# EAGLE board ATtiny84 (EAGLE 6.3)
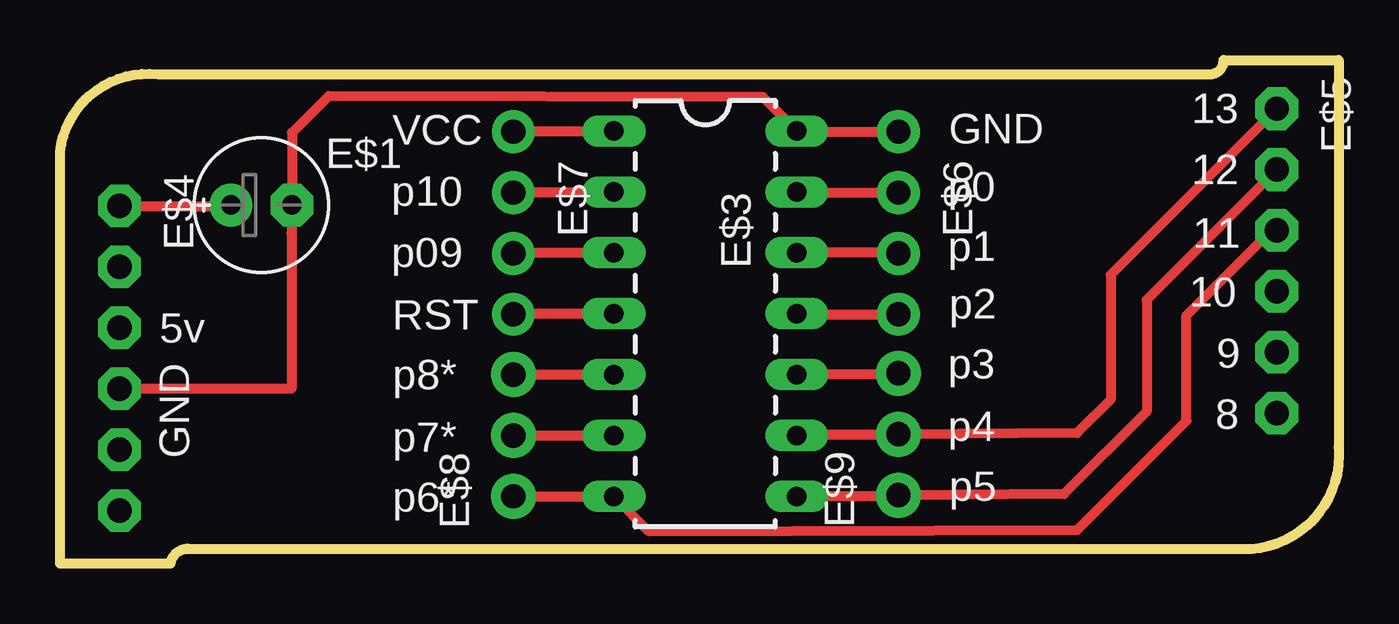
[diagram p0: board, top side]
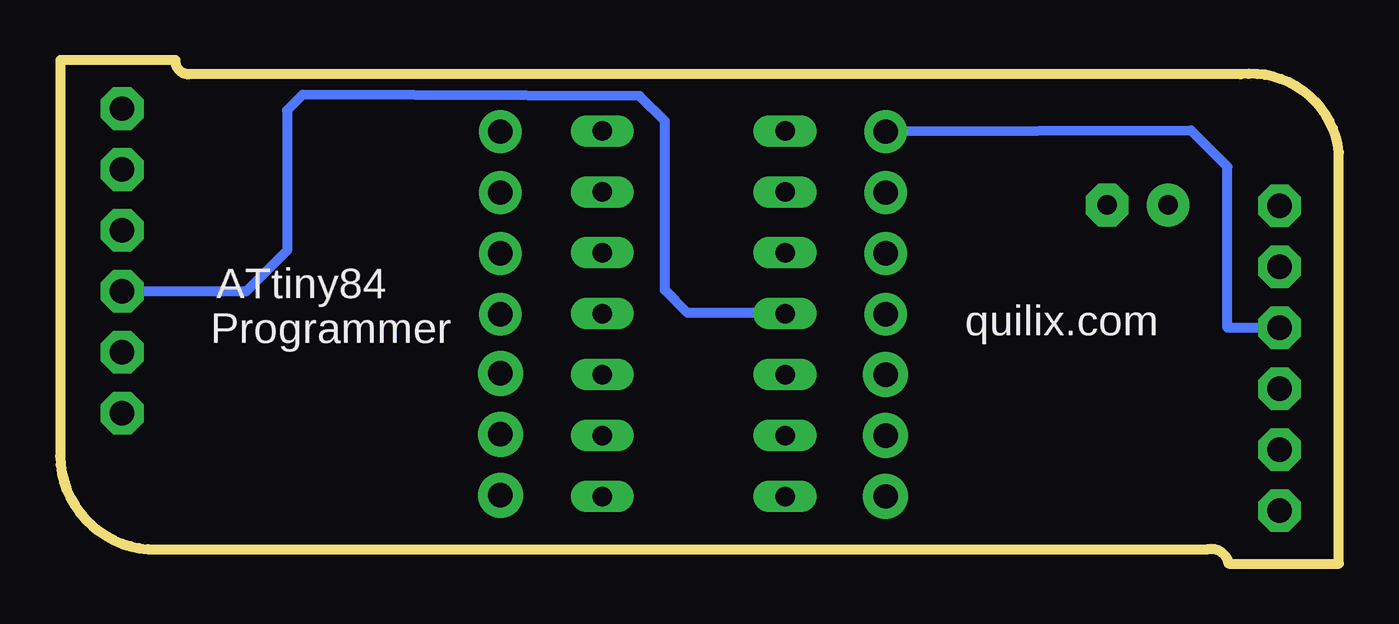
[diagram p1: board, bottom side, seen from below]

Size 53.31 x 21 mm. Coordinates in mm from the lower left corner, seen from the top.
Outline: 53.3,21 53.3,4.85 arc-90 49.65,0.6 5.45,0.6 arc90 4.6,0 0,0 0,17.15 arc-90 4.1,20.4 47.95,20.4 arc90 48.5,21 53.3,21
Copper layers (1*16): Top 0.035mm / dielectric 1.5mm / Bottom 0.035mm
Design rules "default": minimum track width 10mil, minimum drill 24mil, track to track 8mil, track to pad 8mil, pad to pad 8mil, via to via 8mil, smd to smd 8mil, copper to edge 40mil, drill to drill 8mil, minimum pad ring 10mil, minimum via ring 8mil, stop-mask expansion 4mil, vias tented up to drill 0mil, thermal gap 10mil

## Footprints (pad centres in the part's own frame; a part is rotated, then mirrored left to right if it is on the bottom)
E2,5-6E = drill 0.813 pad 1.778: + -1.27,0 | drill 0.813 pad 1.778 octagon: - 1.27,0
DIL14 = drill 0.813 long: 1 -8.89,-3.81; 2 -6.35,-3.81; 3 -3.81,-3.81; 4 -1.27,-3.81; 5 1.27,-3.81; 6 3.81,-3.81; 7 6.35,-3.81; 8 6.35,3.81; 9 3.81,3.81; 10 1.27,3.81; 11 -1.27,3.81; 12 -3.81,3.81; 13 -6.35,3.81; 14 -8.89,3.81
1X06-CLEANBIG = drill 1.016 pad 1.778 octagon: 1 -6.35,0; 2 -3.81,0; 3 -1.27,0; 4 1.27,0; 5 3.81,0; 6 6.35,0
1X04-CLEANBIG = drill 1.016 pad 1.778: 1 -3.81,0; 2 -1.27,0; 3 1.27,0; 4 3.81,0
1X03_NO_SILK = drill 1.016 pad 1.88: 1 0,0; 2 2.54,0; 3 5.08,0

## Placement (x,y rotation side)
E$1  [E2,5-6E]  8.4,14.95 0 top
E$3  [DIL14]  26.9,9.15 270 top
E$4  [1X06-CLEANBIG]  2.48,8.56 270 top
E$5  [1X06-CLEANBIG]  50.72,12.62 270 top
E$6  [1X04-CLEANBIG]  34.95,14.2 270 top
E$7  [1X04-CLEANBIG]  18.9,14.2 270 top
E$8  [1X03_NO_SILK]  18.9,2.8 90 top
E$9  [1X03_NO_SILK]  34.95,2.85 90 top

## Library data of the parts
E$1 E$4-E$7 = adafruit
E$3 E$8 E$9 = SparkFun

## Nets
S$2: E$3.1 E$4.3 E$7.1
S$3: E$3.2 E$7.2
S$4: E$3.4 E$5.4 E$7.4
S$5: E$1.+ E$4.1
S$6: E$1.- E$3.14 E$4.4 E$6.1
S$7: E$3.3 E$7.3
S$9: E$3.5 E$8.3
S$10: E$3.6 E$8.2
S$11: E$3.7 E$5.3 E$8.1
S$13: E$3.13 E$6.2
S$14: E$3.12 E$6.3
S$15: E$3.11 E$6.4
S$16: E$3.10 E$9.3
S$17: E$3.9 E$5.1 E$9.2
S$18: E$3.8 E$5.2 E$9.1

## Tracks (layer width: path | path; a pad name or v marks a point on that pad's centre or on a via)
S$2
  Top 0.406: E$7.1 18.93,18.04 E$3.1
  Bottom 0.406: E$4.3 4.65,9.83 4.65,16.55 6.16,18.06 E$7.1
S$3
  Top 0.406: E$3.2 23.06,15.47 E$7.2
S$4
  Top 0.406: E$7.4 18.93,10.42 E$3.4
  Bottom 0.305: 50.72,11.27 E$5.4
  Bottom 0.406: E$3.4 23.12,10.45 27.15,10.45 28.1,11.4 28.1,18.45 29.15,19.5 43.2,19.55 43.85,18.9 43.85,13.05 45.55,11.35 E$5.4
S$5
  Top 0.305: 7.09,14.9 E$1.+
  Top 0.406: E$4.1 7.09,14.9
S$6
  Top 0.406: E$4.4 9.65,7.29 9.65,13.77 E$1.- 9.67,17.97 11.2,19.5 29.3,19.45 E$3.14 30.74,18.01 E$6.1
S$7
  Top 0.406: E$7.3 18.93,12.96 E$3.3
S$9
  Top 0.406: E$8.3 E$3.5
S$10
  Top 0.406: E$8.2 E$3.6
S$11
  Top 0.406: E$8.1 E$3.7 24.54,1.35 42.4,1.4 46.95,5.95 46.95,10.35 50.49,13.89 E$5.3
S$13
  Top 0.406: E$3.13 30.74,15.47 E$6.2
S$14
  Top 0.406: E$6.3 34.92,12.96 E$3.12
S$15
  Top 0.406: E$3.11 30.74,10.39 E$6.4
S$16
  Top 0.406: E$9.3 34.9,7.88 E$3.10
S$17
  Top 0.406: E$3.9 30.76,5.39 E$9.2 42.39,5.44 43.8,6.85 43.8,12.05 E$5.1
S$18
  Top 0.406: E$3.8 34.9,2.8 E$9.1 41.85,2.9 45.3,6.35 45.3,11.01 E$5.2

## Text on the board
_tsilk: 13 | VCC | GND | 12 | p10 | p0 | 11 | p09 | p1 | p2 | 10 | 5v | RST | 9 | p8* | p3 | p4 | 8 | GND | p7* | p6* | p5
_bsilk: ATtiny84 | Programmer | quilix.com